# Altium PCB BAILEY.PcbDoc (part 8 of 8)
Units mil, origin at the board's own origin, x right, y up, seen from the top; angles counter-clockwise.
Board outline 6100 x 3000 mil, 4 copper layers (Signal Layer 1, Signal Layer 2, Signal Layer 3, Signal Layer 4), stack 59.904 mil thick; 167 components, 96 nets, 718 pads, 2907 vias.
Unrouted connection lines stored in the file: 1.
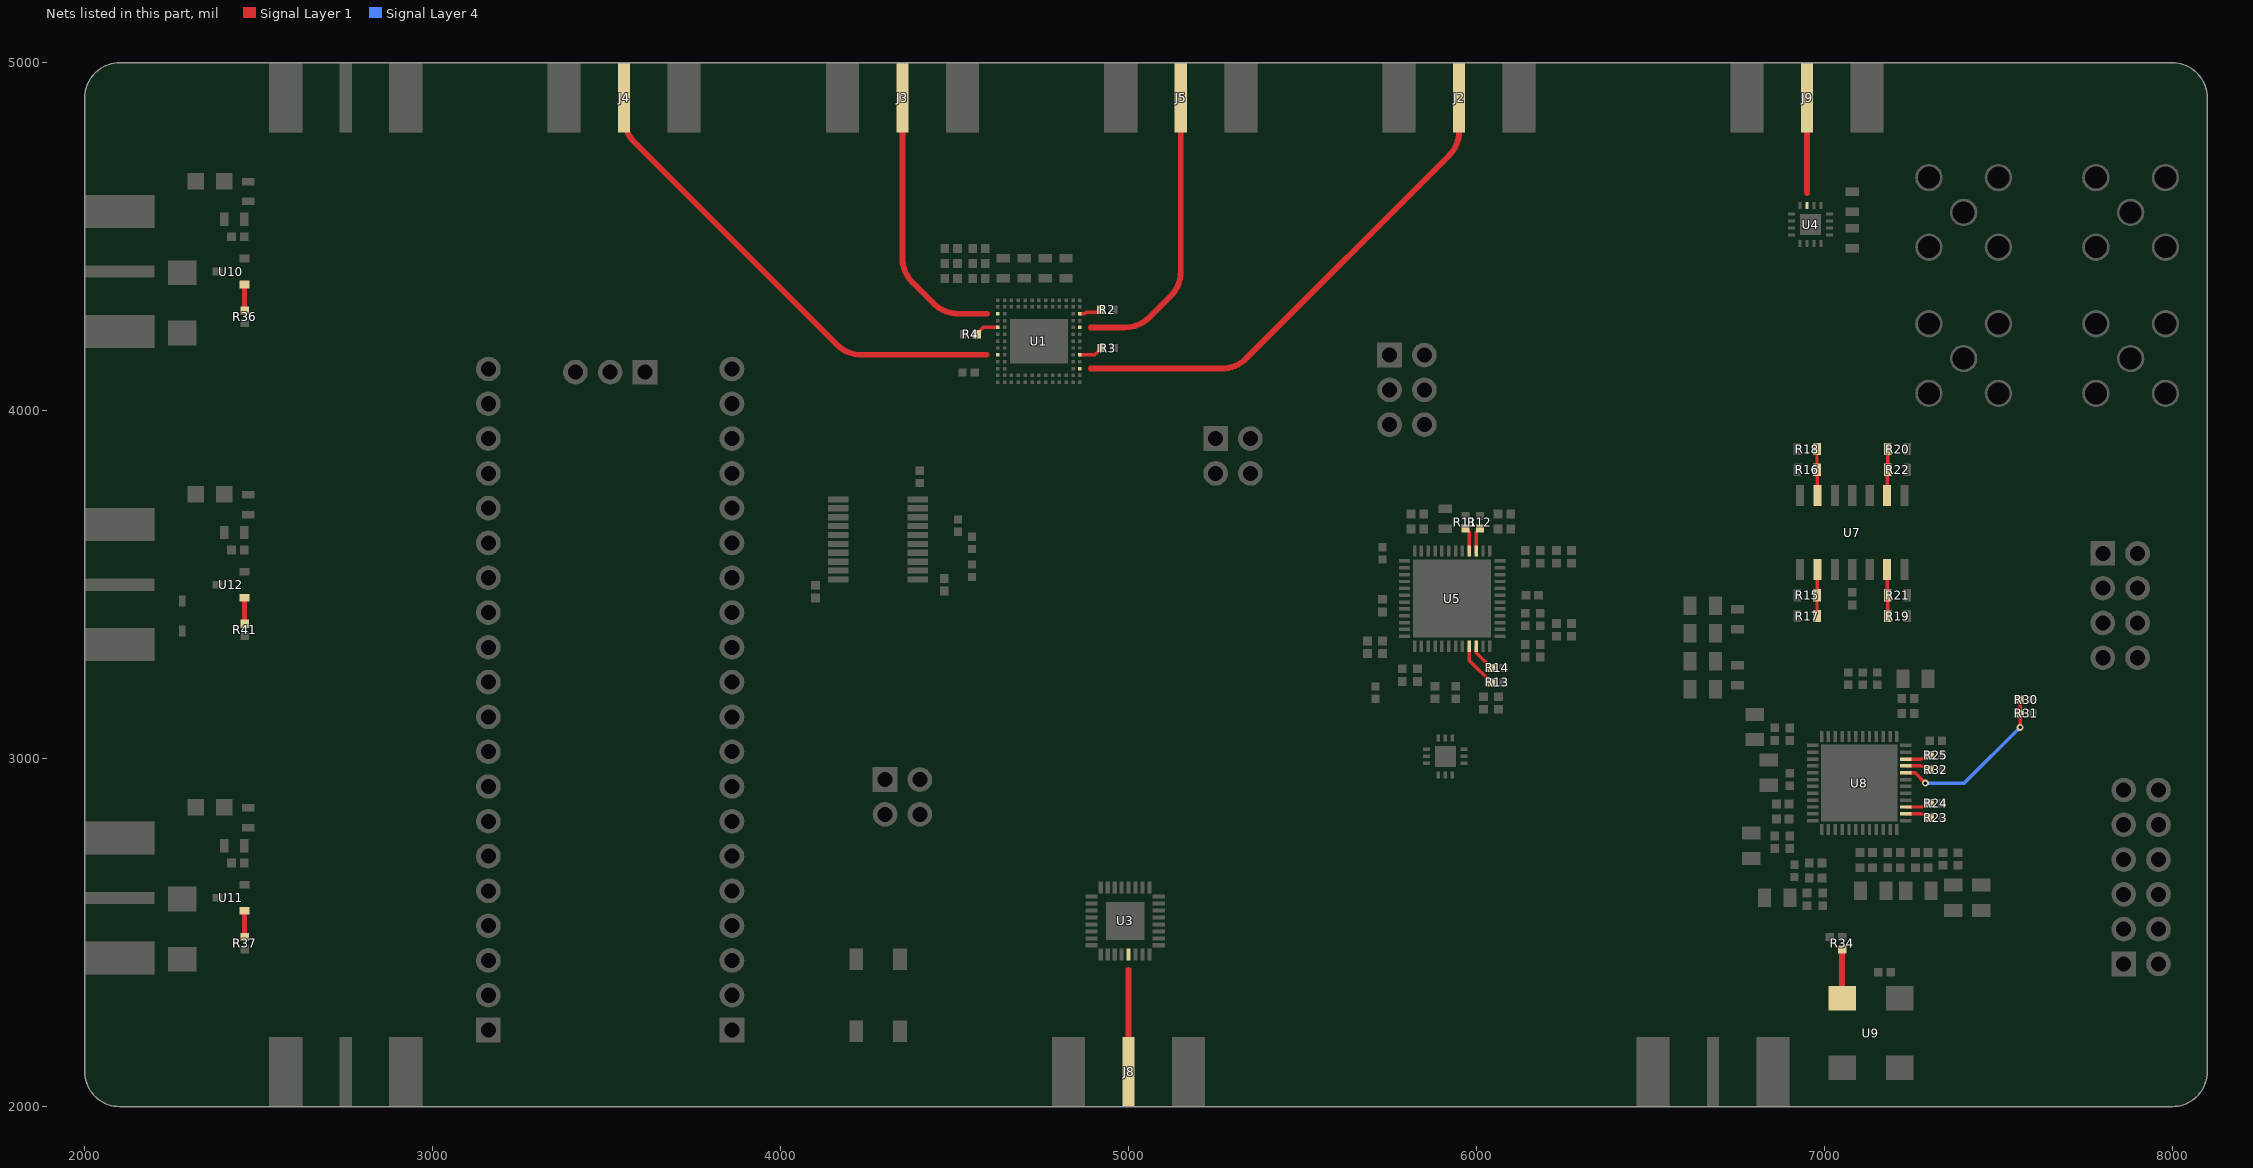
[diagram p6: the nets of this part, all layers, seen from the top]

## Via types
v1: diameter 13.78, hole 7.87, Signal Layer 1 to Signal Layer 4, tented both sides, 1913 vias
v2: diameter 15, hole 15, Signal Layer 1 to Signal Layer 4, 378 vias
v3: diameter 7.87, hole 7.87, Signal Layer 1 to Signal Layer 4, 335 vias
v4: diameter 20, hole 10, Signal Layer 1 to Signal Layer 4, 130 vias
v5: diameter 16, hole 16, Signal Layer 1 to Signal Layer 4, 96 vias
v6: diameter 12, hole 12, Signal Layer 1 to Signal Layer 4, 49 vias
v7: diameter 196.85, hole 125.98, Signal Layer 1 to Signal Layer 4, 4 vias
v8: diameter 25, hole 15, Signal Layer 1 to Signal Layer 4, 2 vias

## Nets (pads, with @x,y where several pads share a name; then routed paths per layer and width w, separated by ;. In a path a pad name is that pad's centre, name@x,y a point inside that pad or via, vN(x,y) a via of type N, cw(c..) or ccw(c..) an arc to the next point about the centre after c; other vN are vias at no path point) (continued)
NetR2_2: R2.2 U1.L1 | length 65.4
  Signal Layer 1 w10: U1.L1@4860.24,4278.74 4874.13,4278.74 4878.58,4283.19 4914.14,4283.19 R2.2@4920.95,4290
NetR3_2: R3.2 U1.E1 | length 70.1
  Signal Layer 1 w10: U1.E1@4860.24,4160.63 4902.91,4160.63 R3.2@4922.28,4180
NetR4_2: R4.2 U1.J13 | length 68.7
  Signal Layer 1 w10: R4.2@4563.31,4220 4582.68,4239.37 U1.J13@4624.02,4239.37
NetR11_2: R11.2 U5.40 | length 69.8
  Signal Layer 1 w10: R11.2@5968.24,3662.28 5979.21,3651.32 U5.40@5979.21,3597
NetR12_2: R12.2 U5.39 | length 69.8
  Signal Layer 1 w10: U5.39@5998.9,3597 5998.9,3651.31 R12.2@6009.87,3662.28
NetR13_2: R13.2 U5.21 | length 129.9
  Signal Layer 1 w10: U5.21@5979.21,3323 5979.21,3282.26 R13.2@6042.28,3219.19
NetR14_2: R14.2 U5.22 | length 80.2
  Signal Layer 1 w10: U5.22@5998.9,3323 5998.9,3304.2 R14.2@6042.28,3260.81
NetR15_1: R15.1 R17.1 U7.2 | length 134.3
  Signal Layer 1 w10: R17.1@6978.54,3410 R15.1@6978.54,3470 6979.27,3470.73 6979.27,3542.97 U7.2@6980,3543.7
NetR16_1: R16.1 R18.1 U7.13 | length 134.3
  Signal Layer 1 w10: R18.1@6978.54,3890 R16.1@6978.54,3830 6979.27,3829.27 6979.27,3757.03 U7.13@6980,3756.3
NetR19_1: R19.1 R21.1 U7.6 | length 134.3
  Signal Layer 1 w10: U7.6@7180,3543.7 7180.73,3542.97 7180.73,3470.73 R21.1@7181.46,3470 R19.1@7181.46,3410
NetR20_1: R20.1 R22.1 U7.9 | length 134.3
  Signal Layer 1 w10: U7.9@7180,3756.3 7180.73,3757.03 7180.73,3829.27 R22.1@7181.46,3830 R20.1@7181.46,3890
NetR23_1: R23.1 U8.26 | length 71.5
  Signal Layer 1 w10: U8.26@7233.76,2841.42 7275.8,2841.42 cw(c7275.8,2803.97) R23.1@7302.28,2830.45
NetR24_1: R24.1 U8.27 | length 71.5
  Signal Layer 1 w10: U8.27@7233.76,2861.1 7275.8,2861.1 ccw(c7275.8,2898.55) R24.1@7302.28,2872.07
NetR25_1: R25.1 U8.34 | length 71.5
  Signal Layer 1 w10: U8.34@7233.76,2998.9 7275.8,2998.9 ccw(c7275.8,3036.35) R25.1@7302.28,3009.87
NetR30_1: R30.1 R31.1 U8.32 | length 487
  Signal Layer 1 w10: U8.32@7233.76,2959.53 7260.47,2959.53 v4(7290,2930) ; v4(7562.28,3090) R31.1@7562.28,3130 R30.1@7562.28,3170
  Signal Layer 4 w10: v4(7290,2930) 7402.28,2930 v4(7562.28,3090)
NetR32_2: R32.2 U8.33 | length 71.5
  Signal Layer 1 w10: U8.33@7233.76,2979.21 7275.8,2979.21 cw(c7275.8,2941.77) R32.2@7302.28,2968.24
NetR34_1: R34.1 U9.3 | length 140.9
  Signal Layer 1 w16.65: U9.3@7050.79,2311.42 R34.1@7050.79,2452.28
NetR36_2: R36.2 U10.1 | length 75.4
  Signal Layer 1 w15: U10.1@2458.74,4362.6 2459.37,4361.97 2459.37,4288.35 R36.2@2460,4287.72
NetR37_2: R37.2 U11.1 | length 75.4
  Signal Layer 1 w15: U11.1@2458.74,2562.6 2459.37,2561.97 2459.37,2488.35 R37.2@2460,2487.72
NetR41_2: R41.2 U12.1 | length 75.4
  Signal Layer 1 w15: U12.1@2458.74,3462.6 2459.37,3461.97 2459.37,3388.35 R41.2@2460,3387.72
RF_IN_2: J8.1 U3.21 | length 293.5
  Signal Layer 1 w16.65: J8.1@5000,2100 5000,2393.48
RX_IN_3: J9.1 U4.3 | length 274
  Signal Layer 1 w16.65: 6950,4626.02 J9.1@6950,4900
TX_OUT1_1: J3.1 U1.L13 | length 793.7
  Signal Layer 1 w16.65: 4350,4431.42 4350,4439.3 ; J3.1@4350,4900 4350,4439.3 ; 4592.99,4278.74 4510.56,4278.74 cw(c4510.56,4378.74) 4439.84,4308.03 4379.29,4368.58 cw(c4450,4439.3) 4350,4439.3
TX_OUT2_1: J4.1 U1.E13 | length 1429
  Signal Layer 1 w16.65: J4.1@3550,4811.42 J4.1@3550,4842.92 ; J4.1@3550,4900 J4.1@3550,4842.92 ; 4592.13,4160.63 4232.29,4160.63 cw(c4232.29,4260.63) 4161.58,4189.92 3579.29,4772.21 cw(c3650,4842.92) J4.1@3550,4842.92
TX_OUT3_1: J2.1 U1.C1 | length 1445.6
  Signal Layer 1 w16.65: 4891.26,4121.26 5267.71,4121.26 ccw(c5267.71,4221.26) 5338.42,4150.55 5920.71,4732.84 ccw(c5850,4803.55) J2.1@5950,4803.55 ; J2.1@5950,4811.42 J2.1@5950,4900
TX_OUT4_1: J5.1 U1.J1 | length 841
  Signal Layer 1 w16.65: 4891.26,4239.37 4989.44,4239.37 ccw(c4989.44,4339.37) 5060.16,4268.66 5120.71,4329.21 ccw(c5050,4399.93) 5150,4399.93 J5.1@5150,4900
pads on no net: J21.14 J21.15 J21.16 J21.17 J21.19 J21.20 J22.1 J22.2 J22.4 J22.5 J22.6 J22.7 J22.9 J22.10 J22.12 J22.14 J22.15 J23.6 J23.12 J24.1 J24.3 U1.A3 U1.A4 U1.A5 U1.A9 U1.A10 U1.A11 U1.B3 U1.B4 U1.B5 U5.2 U5.3 U5.10 U5.13 U5.28 U5.36 U5.42 U5.47 U6.4 U6.5 U6.8 U6.11 U6.12 U8.2 U8.3 U8.4 U8.5 U8.6 U8.7 U8.17 U8.28 U8.29 U8.30 U8.31

## Polygon pours and split planes (outlines as drawn)
NetD2_1 on Signal Layer 1 "NETD2_1_L01_P007" (solid, remove dead copper, pour order 7): 2438.41,2670 2000,2670 2000,2530 2438.41,2530
NetD1_1 on Signal Layer 1 "NETD1_1_L01_P005" (solid, remove dead copper, pour order 5): 2438.41,4470 2000,4470 2000,4330 2438.41,4330
NetD6_1 on Signal Layer 1 "NETD6_1_L01_P006" (solid, remove dead copper, pour order 6): 2438.41,3570 2000,3570 2000,3430 2438.41,3430
3V3 on Signal Layer 1 "3V3_L01_P004" (solid, remove dead copper, pour order 4): 2610,2920 2445,2920 2445,2530 2610,2530
1V8 on Signal Layer 1 "1V8_L01_P003" (solid, remove dead copper, pour order 3): 2610,3816.35 2445,3816.35 2445,3426.35 2610,3426.35
5V on Signal Layer 1 "5V_L01_P000" (solid, remove dead copper, pour order 0): 2610,4720 2445,4720 2445,4330 2610,4330
GND on Signal Layer 1 "GND_L01_P034" (solid, remove dead copper, pour order 34): 2000,5000 8100,5000 8100,2000 2000,2000
3V3 on Signal Layer 3 "3V3_L03_P045" (solid, pour order 45): 2000,5000 8100,5000 8100,2000 2000,2000
1V8 on Signal Layer 3 "1V8_L03_P044" (solid, pour order 44): 4290,3850 4580,3850 4580,3400 4290,3400
1V8 on Signal Layer 3 "1V8_L03_P041" (solid, pour order 41): 3560,3400 4580,3400 4580,2780 3560,2780
1V8 on Signal Layer 3 "1V8_L03_P038" (solid, pour order 38): 2000,3980 3560,3980 3560,3070 2000,3070
5V on Signal Layer 3 "5V_L03_P037" (solid, pour order 37): 5300,5000 8100,5000 8100,4110 5300,4110
5V on Signal Layer 3 "5V_L03_P021" (solid, pour order 21): 3560,4995 5300,4995 5300,4550 3560,4550
5V on Signal Layer 3 "5V_L03_P017" (solid, pour order 17): 6080,3400 6280,3400 6280,3200 6080,3200
5V on Signal Layer 3 "5V_L03_P016" (solid, pour order 16): 5866.1,4110 6080,4110 6080,3200 5866.1,3200
5V on Signal Layer 3 "5V_L03_P015" (solid, pour order 15): 2000,5000 3560,5000 3560,3980 2000,3980
GND on Signal Layer 2 "GND_L02_P002" (solid, remove dead copper, pour order 2): 2000,5000 8100,5000 8100,2000 2000,2000
GND on Signal Layer 4 "GND_L04_P001" (solid, remove dead copper, pour order 1): 2000,5000 8100,5000 8100,2000 2000,2000

## Other copper
Signal Layer 1:
  rectangle net GND: 4835.55,4293.43 4865.24,4323.11
  rectangle net GND: 4619.02,4175.31 4865.24,4224.69
  rectangle net GND: 4619.02,4293.43 4648.7,4323.11
  rectangle net GND: 4835.55,4076.89 4865.24,4106.57
  rectangle net GND: 4619.02,4076.89 4648.7,4106.57
  rectangle net GND: 4638.7,4096.57 4766.81,4264
  rectangle net GND: 4815.87,4135.94 4845.55,4264.06
  rectangle net GND: 4638.7,4254.06 4845.55,4283.74
  rectangle net GND: 4638.7,4116.26 4845.55,4145.94
  region net ADC_MCLKIN: 7055.69,2780.2 7045.88,2780.2 7042.46,2754.18 7059.11,2754.18
  region net LO_BEAMFORMER: 4747.13,4076.89 4737.13,4076.89 4733.8,4050.87 4750.45,4050.87
  region net TX_OUT2_1: 4619.02,4155.63 4619.02,4165.63 4592.99,4168.95 4592.99,4152.3
  region net TX_OUT1_1: 4619.02,4273.74 4619.02,4283.74 4592.99,4287.06 4592.99,4270.41
  region net TX_OUT4_1: 4865.24,4244.37 4865.24,4234.37 4891.26,4231.05 4891.26,4247.7
  region net TX_OUT3_1: 4865.24,4126.26 4865.24,4116.26 4891.26,4112.94 4891.26,4129.59
  region net NetC24_2: 5925.31,3070 5935.31,3070 5941.97,3096.02 5925.31,3096.02
  region net NetC23_2: 5895.31,3070 5885.31,3070 5878.66,3096.02 5895.31,3096.02
  region net LO_MIXER: 5915.31,2943 5905.31,2943 5901.99,2916.98 5918.64,2916.98
  region net NetC17_1: 6083,3474.84 6083,3464.84 6109.02,3461.52 6109.02,3478.17
  region net NetC24_1: 5915.16,3307 5925.16,3307 5931.81,3280.98 5915.16,3280.98
  region net NetC23_1: 5905.47,3307 5895.47,3307 5888.82,3280.98 5905.47,3280.98
  region net LNA_OUT: 6954.5,4470 6945.5,4470 6941.68,4443.98 6958.32,4443.98
  region net RX_IN_3: 6945.5,4600 6954.5,4600 6958.32,4626.02 6941.68,4626.02
  region net LO_MIXER: 5104,2549.5 5104,2537.5 5130.02,2535.18 5130.02,2551.82
  region net LO_BEAMFORMER: 4876,2537.5 4876,2549.5 4849.98,2551.82 4849.98,2535.18
  region net RF_IN_2: 5006,2419.5 4994,2419.5 4991.68,2393.48 5008.32,2393.48

## Silkscreen, mask and mechanical layers (free items; w line width, h text height)
Top Overlay:
  drawing of 85 lines, arcs and shapes, not listed
  text "RX" at 7258,4872 h60 r90
  text "TX1" at 4658,4852 h60 r90
  text "TX2" at 3858,4832 h60 r90
  text "TX4" at 5458,4832 h60 r90
  text "TX3" at 6258,4832 h60 r90
  text "IF_Q_P" at 7288,4361.33 h40
  text "IF_Q_N" at 7768,4361.33 h40
  text "+5V" at 2678,4315.88 h60 r90
  text "POWER" at 5687.76,4230 h50
  text "+5V" at 5614.9,4145 h25
  text "5V" at 2030,4090 h60
  text "+3V3" at 5595.02,4045 h25
  text "GND" at 5945,4028.1 h25 r90
  text "BEAMFORMER" at 5082.59,3991.11 h50
  text "+3V3" at 5595.02,3945 h25
  text "IF_I_P" at 7288,3941.33 h40
  text "IF_I_N" at 7768,3941.33 h40
  text "TX / LOAD" at 5090,3880 h25
  text "GND" at 5445,3838.1 h25 r90
  text "TR" at 5148.7,3805 h25
  text "ADC" at 7790,3660 h50
  text "CONV_START_N" at 7465,3573.33 h25
  text "BAILEY" at 4890.77,3506.17 h100
  text "FAULT_N" at 7585,3473.33 h25
  text "GND" at 7985,3415 h25 r90
  text "+1V8" at 2678,3396.74 h60 r90
  text "RST_N" at 7625,3373.33 h25
  text "X-Band 4x1 T/R Module Board" at 4870.77,3339.05 h40
  text "DATA_READY" at 7505,3273.33 h25
  text "Rev. 1" at 4878.77,3272.05 h40
  text "CALIBRATION" at 2888,3250.62 h60 r90
  text "Titan Yuan" at 4878.77,3192.05 h40
  text "1V8" at 2030,3170 h60
  text "POWER" at 4237.76,3010 h50
  text "PMOD" at 7820,2980 h50
  text "+1V8" at 4148.95,2925 h25
  text "+1V8" at 4148.95,2825 h25
  text "GND" at 4495,2808.1 h25 r90
  text "+3V3" at 2678,2492.02 h60 r90
  text "NC" at 7513.58,2295 h25
  text "NC" at 7605,2295 h25
  text "3V3" at 2026.59,2290 h60
  text "RESET" at 4415,2265 h25 r90
  text "GND" at 7491.2,2245 h25
  text "GND" at 7605,2245 h25
  text "SCLK" at 7474.18,2195 h25
  text "DATA READY" at 7605,2195 h25
  text "50 MHz" at 7316.4,2178 h40 r90
  text "CONV START" at 7605,2145 h25
  text "FS_ADC" at 7427.17,2143.33 h25
  text "DOUT1" at 7458.71,2095 h25
  text "TR" at 7605,2095 h25
  text "DOUT0" at 7448,2045 h25
  text "TX LOAD" at 7605,2045 h25
  text "EXT REF" at 6988,2032 h60 r90
  text "CHIRP / IN" at 5420,2020 h60 r90
Top Solder:
  lines w116.65: 2750,2000 2750,5000 ; 3550,4811.42 3550,4842.92 ; 3550,5000 3550,4842.92 ; 4350,4431.42 4350,4439.3 ; 4350,5000 4350,4439.3 ; 4597.13,4116.81 5267.71,4121.26 ccw(c5267.71,4221.26) 5338.42,4150.55 5920.71,4732.84 ccw(c5850,4803.55) 5950,4803.55 ; 4597.13,4239.37 4989.44,4239.37 ccw(c4989.44,4339.37) 5060.16,4268.66 5120.71,4329.21 ccw(c5050,4399.93) 5150,4399.93 5150,5000 ; 4742.13,4101.57 4742.13,2643.5 ccw(c4842.13,2643.5) 4842.13,2543.5 ; 4887.13,4160.63 4232.29,4160.63 cw(c4232.29,4260.63) 4161.58,4189.92 3579.29,4772.21 cw(c3650,4842.92) 3550,4842.92 ; 4887.13,4278.74 4510.56,4278.74 cw(c4510.56,4378.74) 4439.84,4308.03 4379.29,4368.58 cw(c4450,4439.3) 4350,4439.3 ; 5000,2000 5000,2437 ; 5880.31,3171.89 5880.31,3117.19 ccw(c5897.01,3117.19) 5885.21,3105.38 cw(c5880.9,3101.08) 5886.99,3101.08 5886.99,3096.02 ; 5880.31,3208.11 5880.31,3216.62 cw(c5913.38,3216.62) 5890,3240 ccw(c5872.74,3257.26) 5897.15,3257.26 5897.15,3323 ; 5910.31,3060 5910.31,2881.74 cw(c5810.31,2881.74) 5881.03,2811.03 5642.79,2572.79 cw(c5572.08,2643.5) 5572.08,2543.5 4849.98,2543.5 4842.13,2543.5 ; 5923.48,3323 5923.48,3257.26 ccw(c5947.89,3257.26) 5930.63,3240 cw(c5907.25,3216.62) 5940.31,3216.62 5940.31,3208.11 ; 5933.64,3096.02 5933.64,3101.08 cw(c5939.73,3101.08) 5935.42,3105.38 ccw(c5923.62,3117.19) 5940.32,3117.19 5940.31,3171.89 ; 5950,4811.42 5950,5000 ; 6067,3469.84 6109.02,3469.84 6109.18,3470 6141.89,3470 ; 6178.11,3470 6238.58,3470 ccw(c6238.58,3570) 6309.29,3499.29 6920.71,4110.71 ccw(c6850,4181.42) 6950,4181.42 6950,5000 ; 6680,2000 6680,2268.58 cw(c6780,2268.58) 6709.29,2339.29 6830,2460 cw(c6896.91,2393.09) 6896.91,2487.72 7050.79,2487.72 ; 7050.79,2311.42 7050.79,2796.24 ; 7233.76,2830.45 7398.13,2830.45 cw(c7398.13,2730.45) 7468.84,2801.16 7860,2410 ; 7233.76,2872.07 7456.51,2872.07 cw(c7456.51,2772.07) 7527.22,2842.78 7860,2510 ; 7233.76,2968.24 7460.33,2968.24 cw(c7460.33,2868.24) 7531.04,2938.96 7860,2610 ; 7233.76,3009.87 7518.71,3009.87 cw(c7518.71,2909.87) 7589.42,2980.58 7860,2710 ; 4842.13,2543.5 4842.13,2543.5
Mechanical 1:
  lines w10: 8100,2099.73 8100,4899.73 ; 8100,2100 cw(c8000,2100) 8000,2000 2100,2000 cw(c2100,2100) 2000,2100 2000,4900 cw(c2100,4900) 2100,5000 8000,5000 cw(c8000,4900) 8100,4900
Mechanical 13:
  lines w3.94: 3096.22,2109.64 3330,2109.64 3330,2081.22 3630,2081.22 3690,2081.22 3690,2109.64 3922.99,2109.64 3922.99,4173.65 3096.22,4173.65 3096.22,2109.64
Mechanical 15:
  lines w1.97: 3490.32,3181.22 3529.69,3181.22 ; 3510,3161.54 3510,3200.91 ; 3030,2081.22 3030,4241.22 3990,4241.22 3990,2081.22 3030,2081.22

## Text inside footprints (layer, text, board x,y; h text height)
U5: Top Overlay "*" at 5739.5,3553.11 h50
U8: Top Overlay "*" at 6912.7,3023.11 h50